# Altium PCB BatteryChargerSwitch.PcbDoc
Units mm, origin at the board's own origin, x right, y up, seen from the top; angles counter-clockwise.
Board outline 50 x 25 mm, 2 copper layers (Top Layer, Bottom Layer); 10 components, 8 nets, 32 pads, 0 vias.
Unrouted connection lines stored in the file: 1.
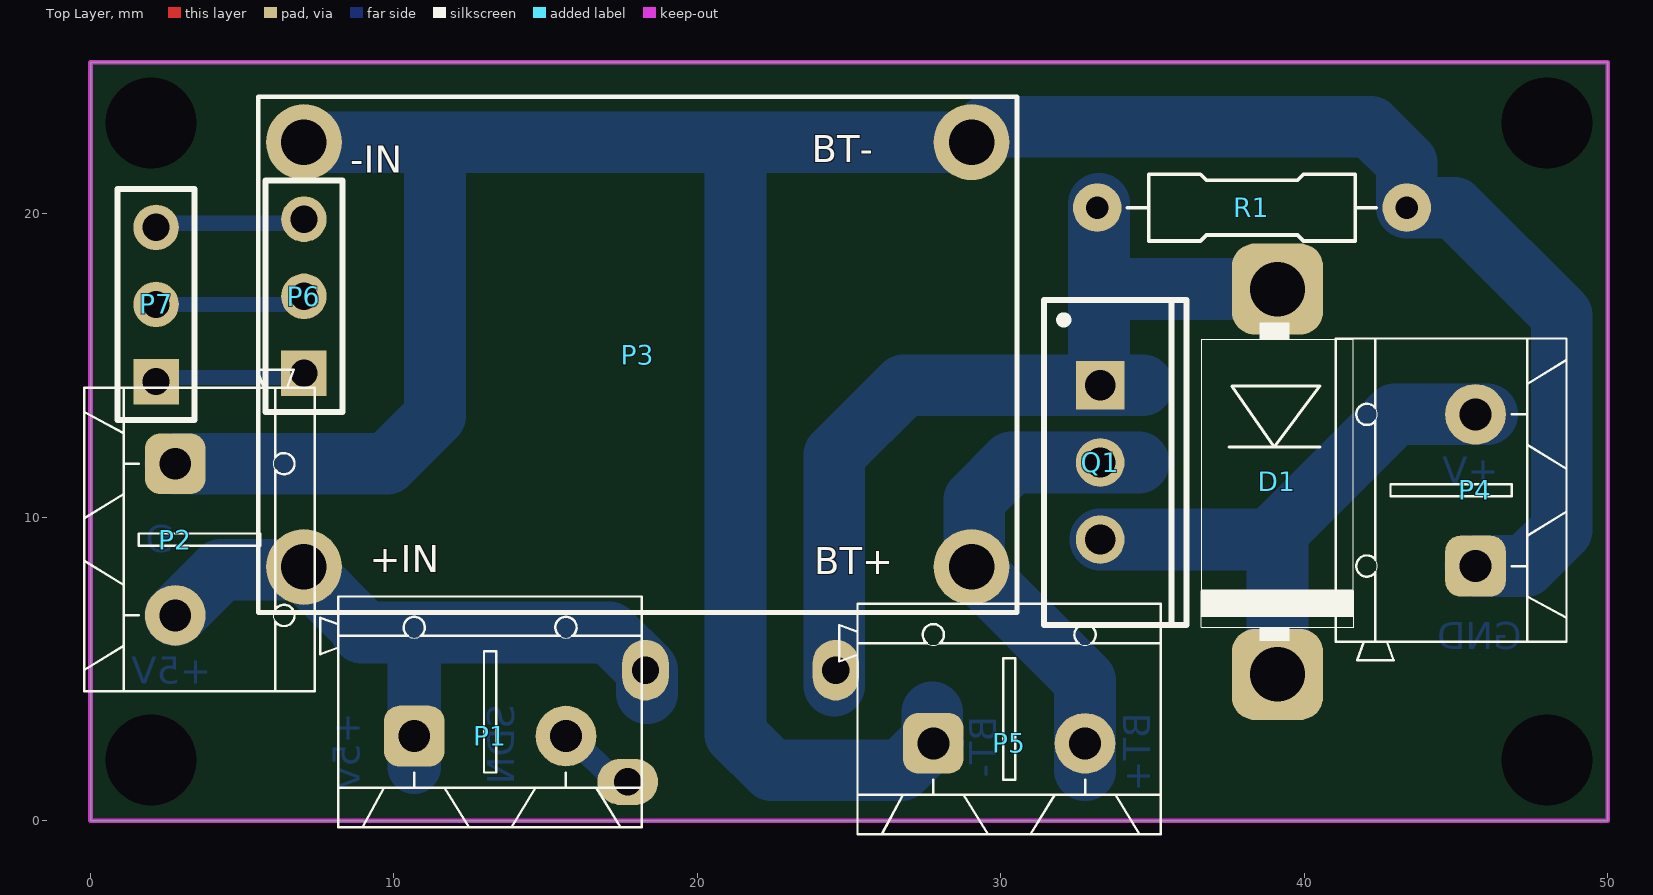
[diagram p0: Top Layer view]
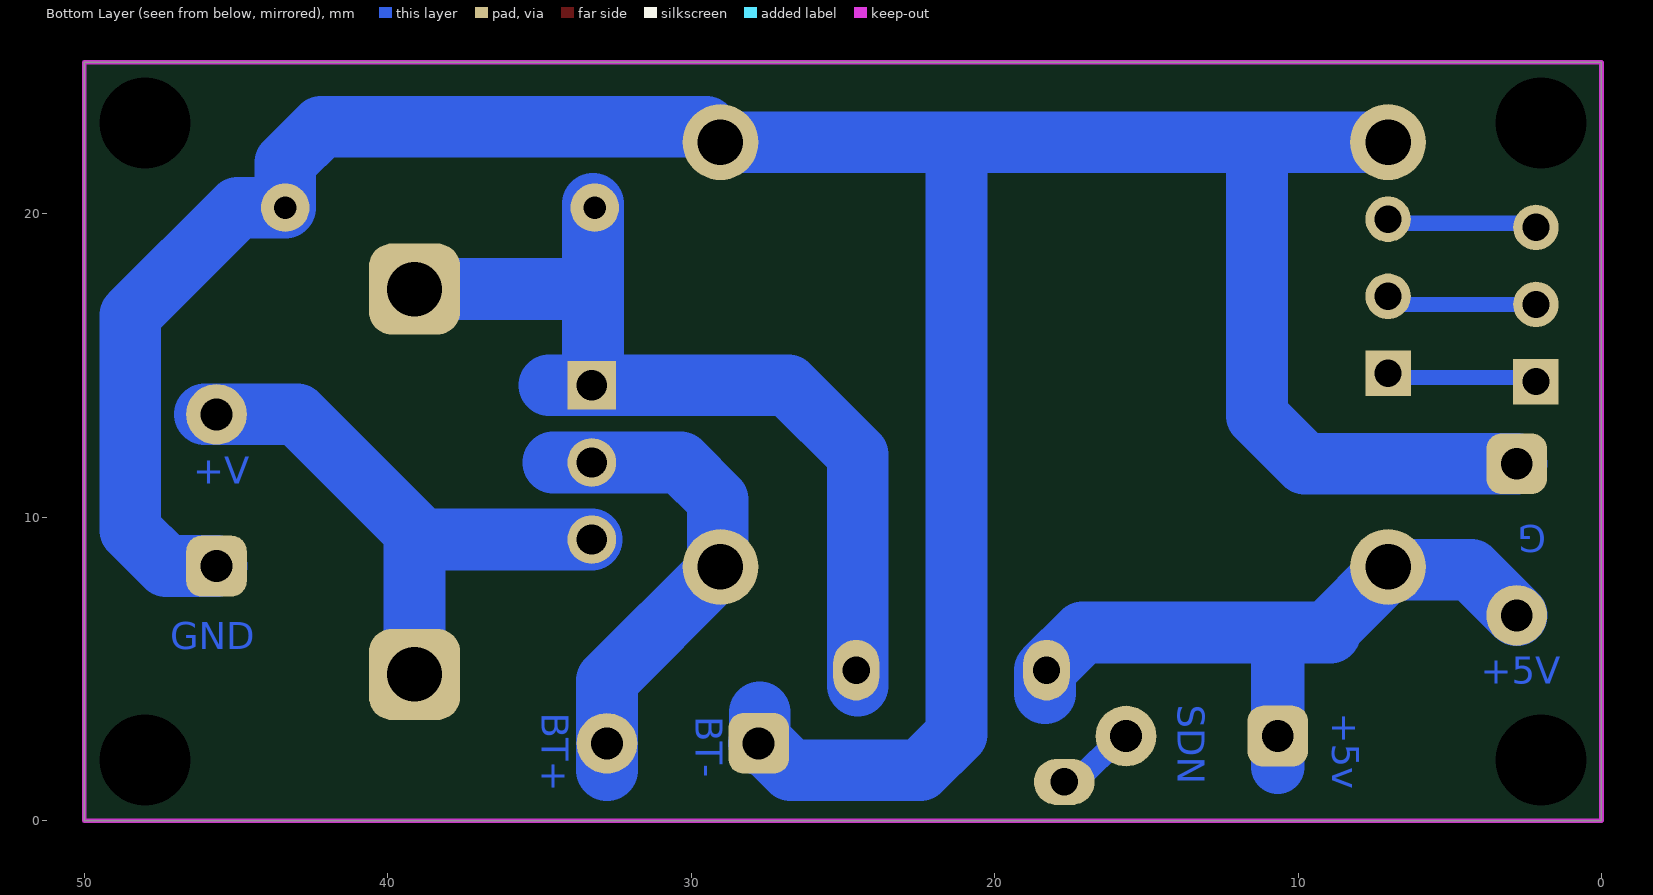
[diagram p1: Bottom Layer view, seen from below]
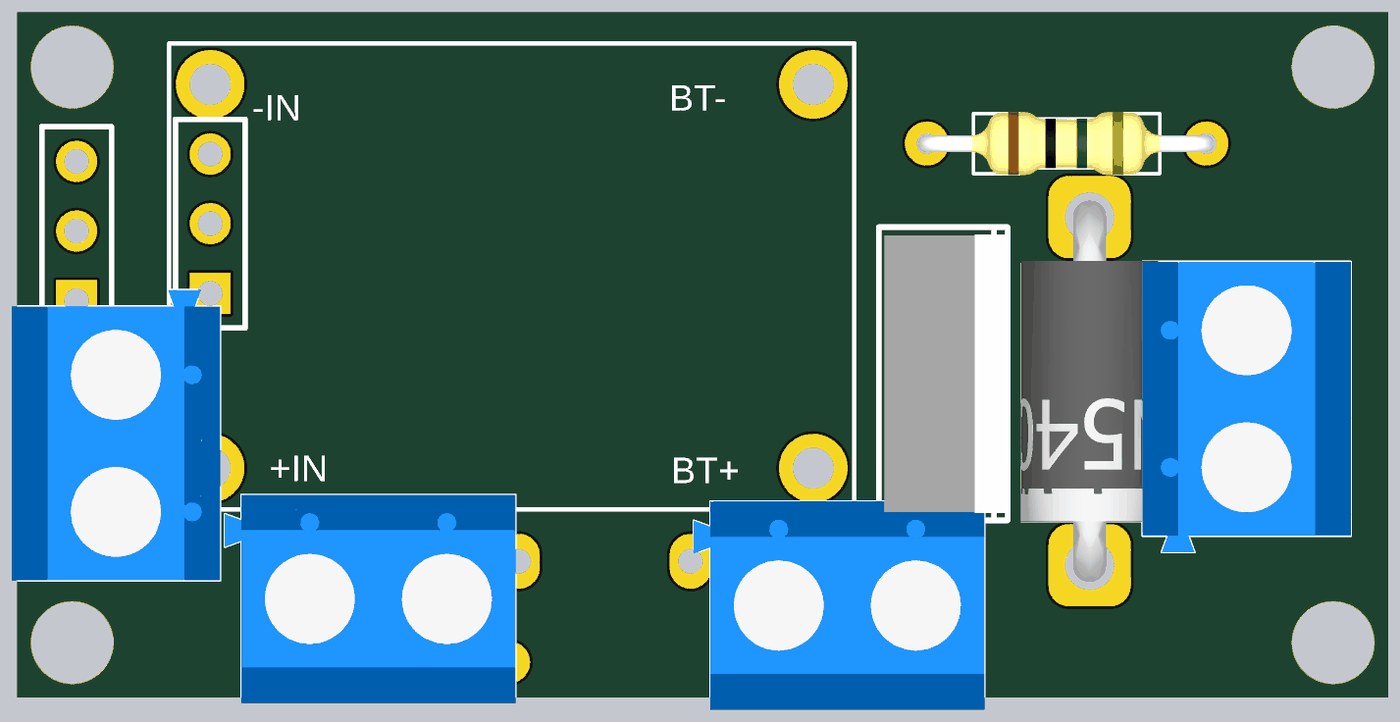
[diagram p2: 3D render of the assembled board from above, using the file's embedded part models]

## Layer stack, top to bottom
Top Solder: solder mask 0.0102, Solder Resist, Dk 3.5
Top Layer: signal copper 0.0356
Dielectric 1: dielectric 0.32, FR-4, Dk 4.8
Bottom Layer: signal copper 0.0356
Bottom Solder: solder mask 0.0102, Solder Resist, Dk 3.5

## Board outline
0,0 50,0 50,25 0,25

## Design rules (kind name [scope] priority, off if disabled: settings)
Clearance [All] p1: gap=0.381 ignorepadtopadclearanceinfootprint=TRUE
PolygonConnect [All] p1: connectstyle=Relief reliefconductorwidth=0.254 reliefentries=4 polygonreliefangle="90 Angle" airgapwidth=0.254
RoutingVias [All] p1: holewidth=0.711 width=1.27 viastyle="Through Hole" minholewidth=0.711 minwidth=1.27 maxholewidth=0.711 maxwidth=1.27
SolderMaskExpansion [All] p1: expansion=0.102 istentingtop=FALSE
Width [All] p1: maxlimit=12.7 minlimit=0.254 preferedwidth=0.508 bottomlayer_prefwidth=0.254 minimp=50.000000 maximp=50.000000 favimp=50.000000
30 further rules are at their usual default settings.

## Components (designator, comment, footprint, x,y, rotation, side; value= is the part's Value field where it differs from the comment)
D1 "Diode 1N5402" "1N5408 DO-201AD" 39.116,11.176 r270 top
P1 "Header" "KF301 2PIN" 13.168,2.794 r0 top
P2 "Header 2" "KF301 2PIN" 2.794,9.271 r270 top
P3 "Header 2X2" TP5100_MODULE 18.034,15.367 r0 top
P4 "OUTPUT POWER" "KF301 2PIN" 45.642,10.897 r90 top
P5 "BATTERY" "KF301 2PIN" 30.275,2.555 r0 top
P6 "Header 3" HDR1X3 7.034,14.747 r90 top
P7 "Header 3" HDR1X3 2.159,14.478 r90 top
Q1 "IRF9540N" "TO-220 AB" 33.274,11.811 r270 top
R1 "Res1" "Axial 0_25 W, 0_4 IN LEAD PITCH" 38.276,20.208 r0 top value=470R

## Footprints (in the part's own frame and the unit in brackets; to place one, negate y for a bottom-side part, rotate by r counter-clockwise, add the part's x,y. Pads: shape width x height; smd on the part's side, far side on the other; paste and mask are expansions set on the pad)
"1N5408 DO-201AD" [mm] "Designer Abbas Basereh"
  rrect50% 3x3 hole 1.8: 1(-6.35,0) 2(6.35,0)
  silkscreen extent -5.25,-2.51 5.25,2.51, body extent -6.95,-2.51 6.95,2.51, height 5.51
"Axial 0_25 W, 0_4 IN LEAD PITCH" [mm] "Designer Abbas Basereh"
  round 1.6 hole 0.75: 1(5.1,0) 2(-5.1,0)
  silkscreen extent -4.1,-1.1 4.1,1.1, body extent -5.4,-1.16 5.36,1.16, height 3.63
HDR1X3 [mm] "Connector; Header; 3 Position"
  rect 1.5x1.5 hole 0.9: 1(0,0)
  round 1.5 hole 0.9: 2(2.54,0) 3(5.08,0)
  silkscreen extent -1.27,-1.27 6.35,1.27
"KF301 2PIN" [mm] "Designer Abbas Basereh"
  rrect50% 2x2 hole 1.05: 1(-2.5,0)
  round 2 hole 1.05: 2(2.5,0)
  silkscreen extent -5.6,-3 5,4.6, body extent -5.6,-3 5,4.6, height 10
"TO-220 AB" [mm] "Epoxy meets UL94, V0-Design:Abbas Basereh"
  rect 1.6x1.6 hole 1: 1(-2.54,0)
  round 1.6 hole 1: 2(0,0) 3(2.54,0)
  silkscreen extent -5.35,-1.85 5.35,2.85, body extent -5.08,-1.65 5.08,2.92, height 18.54
TP5100_MODULE [mm]
  round 2.5 hole 1.5: 1(-11,-7) 2(11,-7) 3(-11,7) 4(11,7)
  silkscreen extent -12.5,-8.5 12.5,8.5

## Part data
D1: "3 Amp General Purpose Rectifier", ComponentLink1Description="Manufacturer Link", ComponentLink1URL=http://www.fairchildsemi.com/, ComponentLink2Description=Datasheet, ComponentLink2URL=http://www.fairchildsemi.com/ds/1N%2F1N5400.pdf, DatasheetVersion=1998, LatestRevisionDate=17-Jul-2002, LatestRevisionNote="Re-released for DXP Platform.", PackageDescription="Diode, Axial; Body 9.5 x 5.6 mm (LxDia. max), Lead Dia. 1.32 mm (max)", PackageReference=DO-201AD, PackageVersion=Aug-1999, Published=8-Jun-2000, Publisher="Altium Limited"
P1 P4 P5: library part "Header 2", "Header, 2-Pin", LatestRevisionDate=17-Jul-2002, LatestRevisionNote="Re-released for DXP Platform.", Publisher="Altium Limited"
P2: "Header, 2-Pin", LatestRevisionDate=17-Jul-2002, LatestRevisionNote="Re-released for DXP Platform.", Publisher="Altium Limited"
P3: "Header, 2-Pin, Dual row", LatestRevisionDate=17-Jul-2002, LatestRevisionNote="Re-released for DXP Platform.", Publisher="Altium Limited"
P6 P7: "Header, 3-Pin", LatestRevisionDate=17-Jul-2002, LatestRevisionNote="Re-released for DXP Platform.", Publisher="Altium Limited"
Q1: "HEXFET Power MOSFET", ComponentLink1Description="Manufacturer Link", ComponentLink1URL=http://www.irf.com/, ComponentLink2Description=Datasheet, ComponentLink2URL=http://www.irf.com/product-info/datasheets/data/irf9540n.pdf, DatasheetVersion=May-1998, LatestRevisionDate=17-Jul-2002, LatestRevisionNote="Re-released for DXP Platform.", Note="Pin 2 is electrically connected to pin 4.", PackageDescription="TO, Thru-Hole, Vertical, Heatsink Mounted; 3 In-Line Leads; Pitch 2.54 mm", PackageReference=TO-220AB, PackageVersion=Feb-1997, Published=8-Jun-2000, Publisher="Altium Limited"
R1: "Resistor", LatestRevisionDate=17-Jul-2002, LatestRevisionNote="Re-released for DXP Platform.", PackageDescription="Axial Device, Thru-Hole; 2 Leads; 0.3 in Pin Spacing", PackageReference=AXIAL-0.3, Published=8-Jun-2000, Publisher="Altium Limited"

## Free pads (board coordinates)
  oval 2x1.524 hole 3: 26(2,2)
  round 1.524 hole 3: 26(2,23) 26(48,2) 26(48,23)
  oval 2x1.524 hole 0.9: 29(17.702,1.285)
  oval 1.524x2 hole 0.9: 29(24.56,4.968)
  oval 1.54x2 hole 0.9: 30(18.288,4.968)

## Nets (pads, with @x,y where several pads share a name; then routed paths per layer and width w, separated by ;. In a path a pad name is that pad's centre, name@x,y a point inside that pad or via, vN(x,y) a via of type N, cw(c..) or ccw(c..) an arc to the next point about the centre after c; other vN are vias at no path point)
+5V: D1.1 P1.1 P2.2 P3.1 pad.29@24.56,4.968 pad.30 Q1.1 R1.2 | length 53.6
  Bottom Layer w1.778: 10.541,6.208 10.668,6.081 P1.1 10.668,1.778
  Bottom Layer w2.032: P2.2 4.3,8.277 6.944,8.277 P3.1 7.034,8.24 8.939,6.335 8.939,6.208 10.541,6.208 17.098,6.208 18.337,4.969 pad.30@18.337,4.206 ; pad.29@24.511,4.46 24.511,12.065 26.797,14.351 Q1.1 ; R1.2@33.234,20.335 33.234,14.391 Q1.1 ; 33.274,17.74 33.488,17.526 D1.1 ; 34.671,14.351 Q1.1
CHRG: P6.3 P7.3 | length 5
  Bottom Layer w0.508: P7.3 2.294,19.693 6.899,19.693 P6.3
GND: P2.1 P3.3 P3.4 P4.1 P5.1 R1.1 | length 100.6
  Bottom Layer w2.032: P2.1 9.773,11.771 11.352,13.35 11.352,22.113 11.098,22.367 ; P3.3 11.098,22.367 ; 21.258,21.218 21.258,2.856 22.448,1.666 26.719,1.666 27.608,2.555 P5.1@27.735,2.555 ; P5.1@27.735,2.515 P5.1@27.735,2.555 ; 27.735,3.571 P5.1@27.735,2.555 ; P5.1 P5.1@27.735,2.555 ; P4.1 47.294,8.397 48.484,9.587 48.484,16.667 44.943,20.208 R1.1 43.376,21.685 42.186,22.875 29.513,22.875 29.005,22.367 11.098,22.367
LED+: P6.2 P7.2 | length 5
  Bottom Layer w0.508: P7.2 6.497,17.018 6.766,17.287 P6.2
NetD1_2: D1.2 P4.2 Q1.3 | length 19.2
  Bottom Layer w2.032: Q1.3 38.862,9.271 39.116,9.525 ; D1.2 39.116,9.525 ; P4.2@46.023,13.397 P4.2 42.988,13.397 39.116,9.525
NetP3_2: P3.2 P5.2 Q1.2 | length 16.4
  Bottom Layer w2.032: P5.2@32.775,1.666 P5.2 32.775,4.627 29.124,8.278 29.124,10.582 30.353,11.811 Q1.2 34.544,11.811
SHDN: P1.2 pad.29@17.702,1.285 | length 2.7
  Bottom Layer w0.762: P1.2 15.812,2.794 17.321,1.285 pad.29@17.702,1.285
STNDBY: P6.1 P7.1 | length 5
  Bottom Layer w0.508: P7.1 2.294,14.613 6.899,14.613 P6.1

## Keep-outs
Keep-Out Layer:
  the board outline again, w0.152

## Other copper
Bottom Layer:
  text "+V" at 46.404,10.81 h1.52
  text "G" at 1.827,10.032 h1.52 r180
  text "GND" at 47.166,5.365 h1.52
  text "+5V" at 3.986,4.222 h1.52
  text "SDN" at 14.257,3.825 h1.52 r90
  text "+5v" at 9.177,3.571 h1.52 r90
  text "BT+" at 35.228,3.571 h1.52 r90
  text "BT-" at 30.148,3.444 h1.52 r90

## Dimensions
0,0 to 50,0 on Mechanical 15
0,0 to 0,25 on Mechanical 15

## Text inside footprints (layer, text, board x,y; h text height)
P3: Top Overlay "-IN" at 8.56,21.057 h1.52; Top Overlay "BT-" at 23.774,21.412 h1.52; Top Overlay "BT+" at 23.851,7.823 h1.52; Top Overlay "+IN" at 9.195,7.899 h1.52